# EAGLE board Vayu_AC_DC (EAGLE 9.6.2)
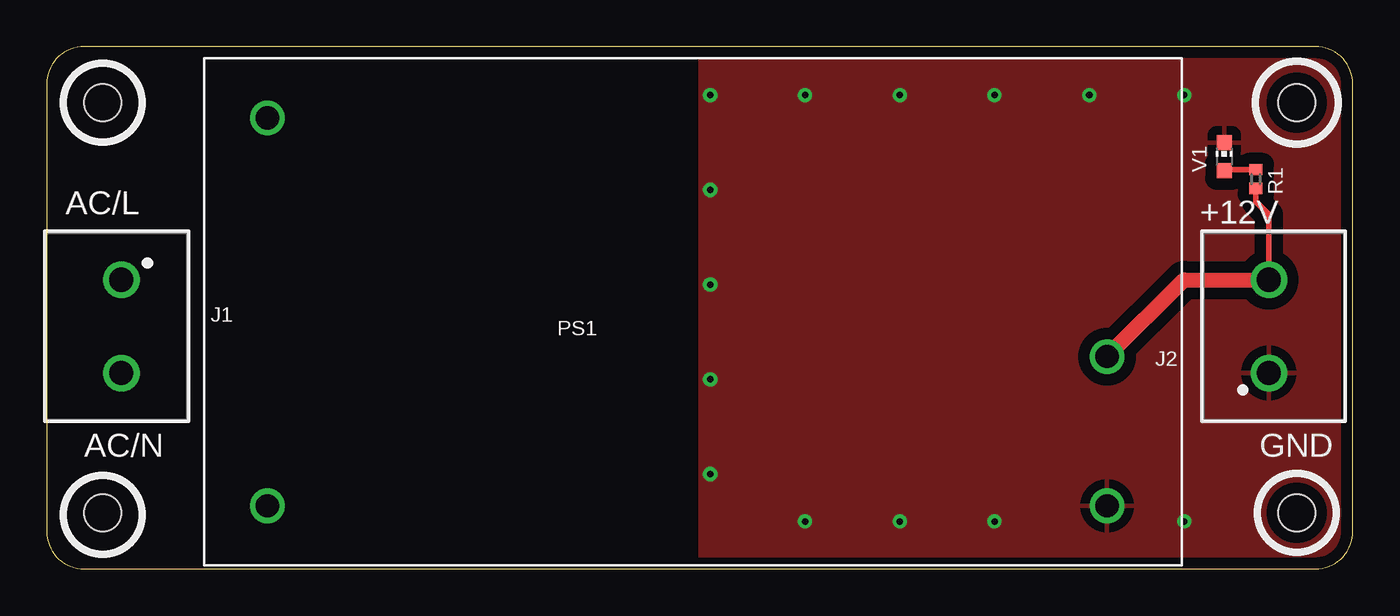
[diagram p0: board, top side]
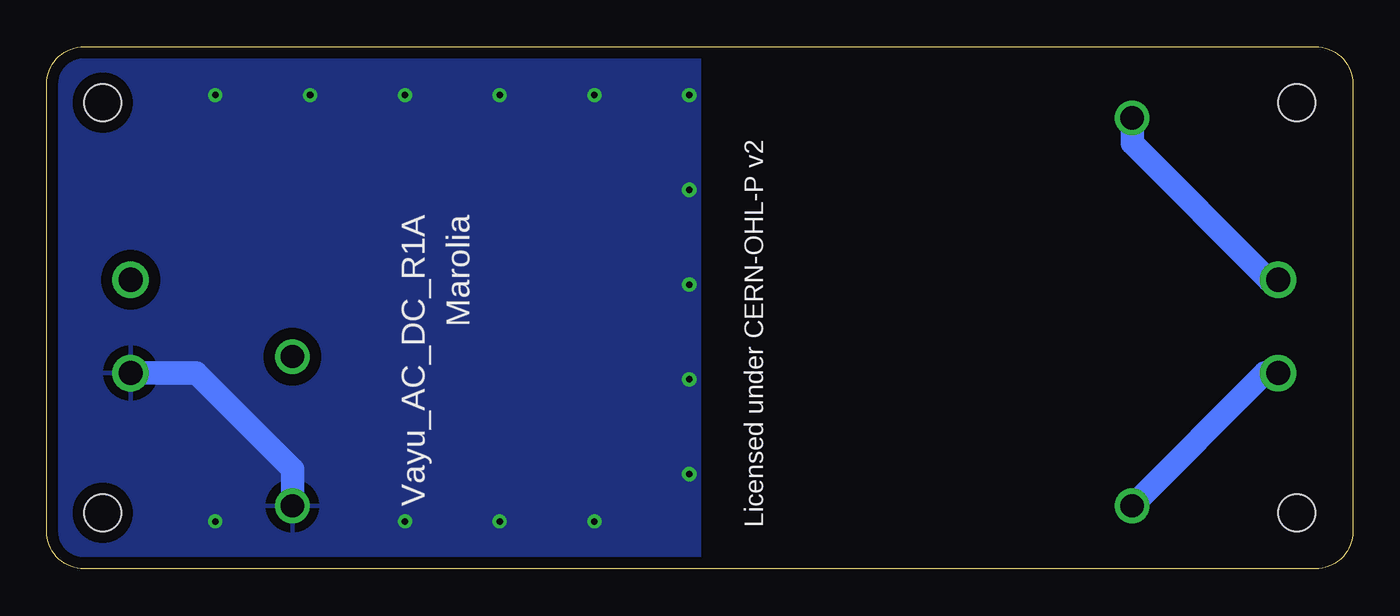
[diagram p1: board, bottom side, seen from below]

Size 70 x 28 mm. Coordinates in mm from the lower left corner, seen from the top.
Outline: 0,26 0,2 arc90 2,0 68,0 arc90 70,2 70,26 arc90 68,28 2,28 arc90 0,26
Copper layers (1*16): Top 0.035mm / dielectric 1.5mm / Bottom 0.035mm
Design rules "HRV_AC_DC": minimum track width 6mil, minimum drill 0.35mm, track to track 6mil, track to pad 6mil, pad to pad 6mil, via to via 6mil, smd to smd 6mil, copper to edge 20mil, drill to drill 6mil, minimum pad ring 7mil, minimum via ring 8mil, stop-mask expansion 4mil, vias tented up to drill 0mil, thermal gap 0.5mm
Holes 2 mm at 3,25 3,3 67,25 67,3

## Footprints (pad centres in the part's own frame; a part is rotated, then mirrored left to right if it is on the bottom)
691137710002 = drill 1.3: 1 -2.5,0; 2 2.5,0
CONV_IRM-15-12 = drill 1.24: +V 22.2,-2.4; -V 22.2,-10.4; AC/L -22.8,10.4; AC/N -22.8,-10.4
R0402 = smd 0.6 x 0.7: 1 -0.5,0; 2 0.5,0
CHIP-LED0603 = smd 0.8 x 0.8: A 0,-0.75; C 0,0.75

## Placement (x,y rotation side)
J1  691137710002  [691137710002]  4,13 270 top
J2  691137710002  [691137710002]  65.5,13 90 top
PS1  IRM-15-12  [CONV_IRM-15-12]  34.63,13.78 0 top
R1  680R  [R0402]  64.8,20.9 270 top
V1  RED  [CHIP-LED0603]  63.1,22.1 0 top

## Library data of the parts
J1 J2 = connectors; DATASHEET-URL: https://www.we-online.com/catalog/datasheet/691137710002.pdf; IR-UL: 16A; IR-VDE: 24A; MOUNT: THT; PART-NUMBER: 691137710002; PINS: 2; PITCH: 5mm; TYPE: Horizontal; WIRE: 12 to 30 (AWG) 3.31 to 0.05 (mm²); WORKING-VOLTAGE-UL: 300V(AC); WORKING-VOLTAGE-VDE: 250V(AC)
PS1 = ac-dc-convertors; MANUFACTURER: Meanwell; STANDARD: IPC-7251
R1 = rcl; SPICEPREFIX: R
V1 = leds

## Nets
AC/L: J1.1 PS1.AC/L
AC/N: J1.2 PS1.AC/N
GND: J2.1 PS1.-V V1.C
N$1: R1.1 V1.A
VDD: J2.2 PS1.+V R1.2

## Tracks (layer width: path | path; a pad name or v marks a point on that pad's centre or on a via)
AC/L
  Bottom 1.27: J1.1 4.5,15.5 11.83,22.83 PS1.AC/L
AC/N
  Bottom 1.27: J1.2 4.71,10.5 PS1.AC/N
GND  (via drill 0.35)
  Bottom 1.27: PS1.-V 56.83,5.33 62,10.5 J2.1
  other vias: 35.56,25.4 40.64,25.4 45.72,25.4 50.8,25.4 55.88,25.4 60.96,25.4 35.56,20.32 35.56,15.24 35.56,10.16 35.56,5.08 40.64,2.54 45.72,2.54 50.8,2.54 60.96,2.54
  pour Top (isolate 0.61): 35,28 70,28 70,0 35,0
  pour Bottom (isolate 0.61): 35,28 70,28 70,0 35,0
N$1
  Top 0.305: V1.A 63.15,21.35 63.2,21.4 R1.1
VDD
  Top 0.305: J2.2 65.5,19 64.8,19.7 R1.2
  Top 0.813: PS1.+V 60.95,15.5 J2.2

## Text on the board
tNames: AC/L | +12V | AC/N | GND
bNames: Licensed under CERN-OHL-P v2 | Marolia | Vayu_AC_DC_R1A